# Altium PCB PCB1.PcbDoc
Units mil, origin at the board's own origin, x right, y up, seen from the top; angles counter-clockwise.
Board outline 3290 x 3910 mil, 2 copper layers (Top Layer, Bottom Layer); 49 components, 38 nets, 154 pads, 3 vias.
Unrouted connection lines stored in the file: 1.
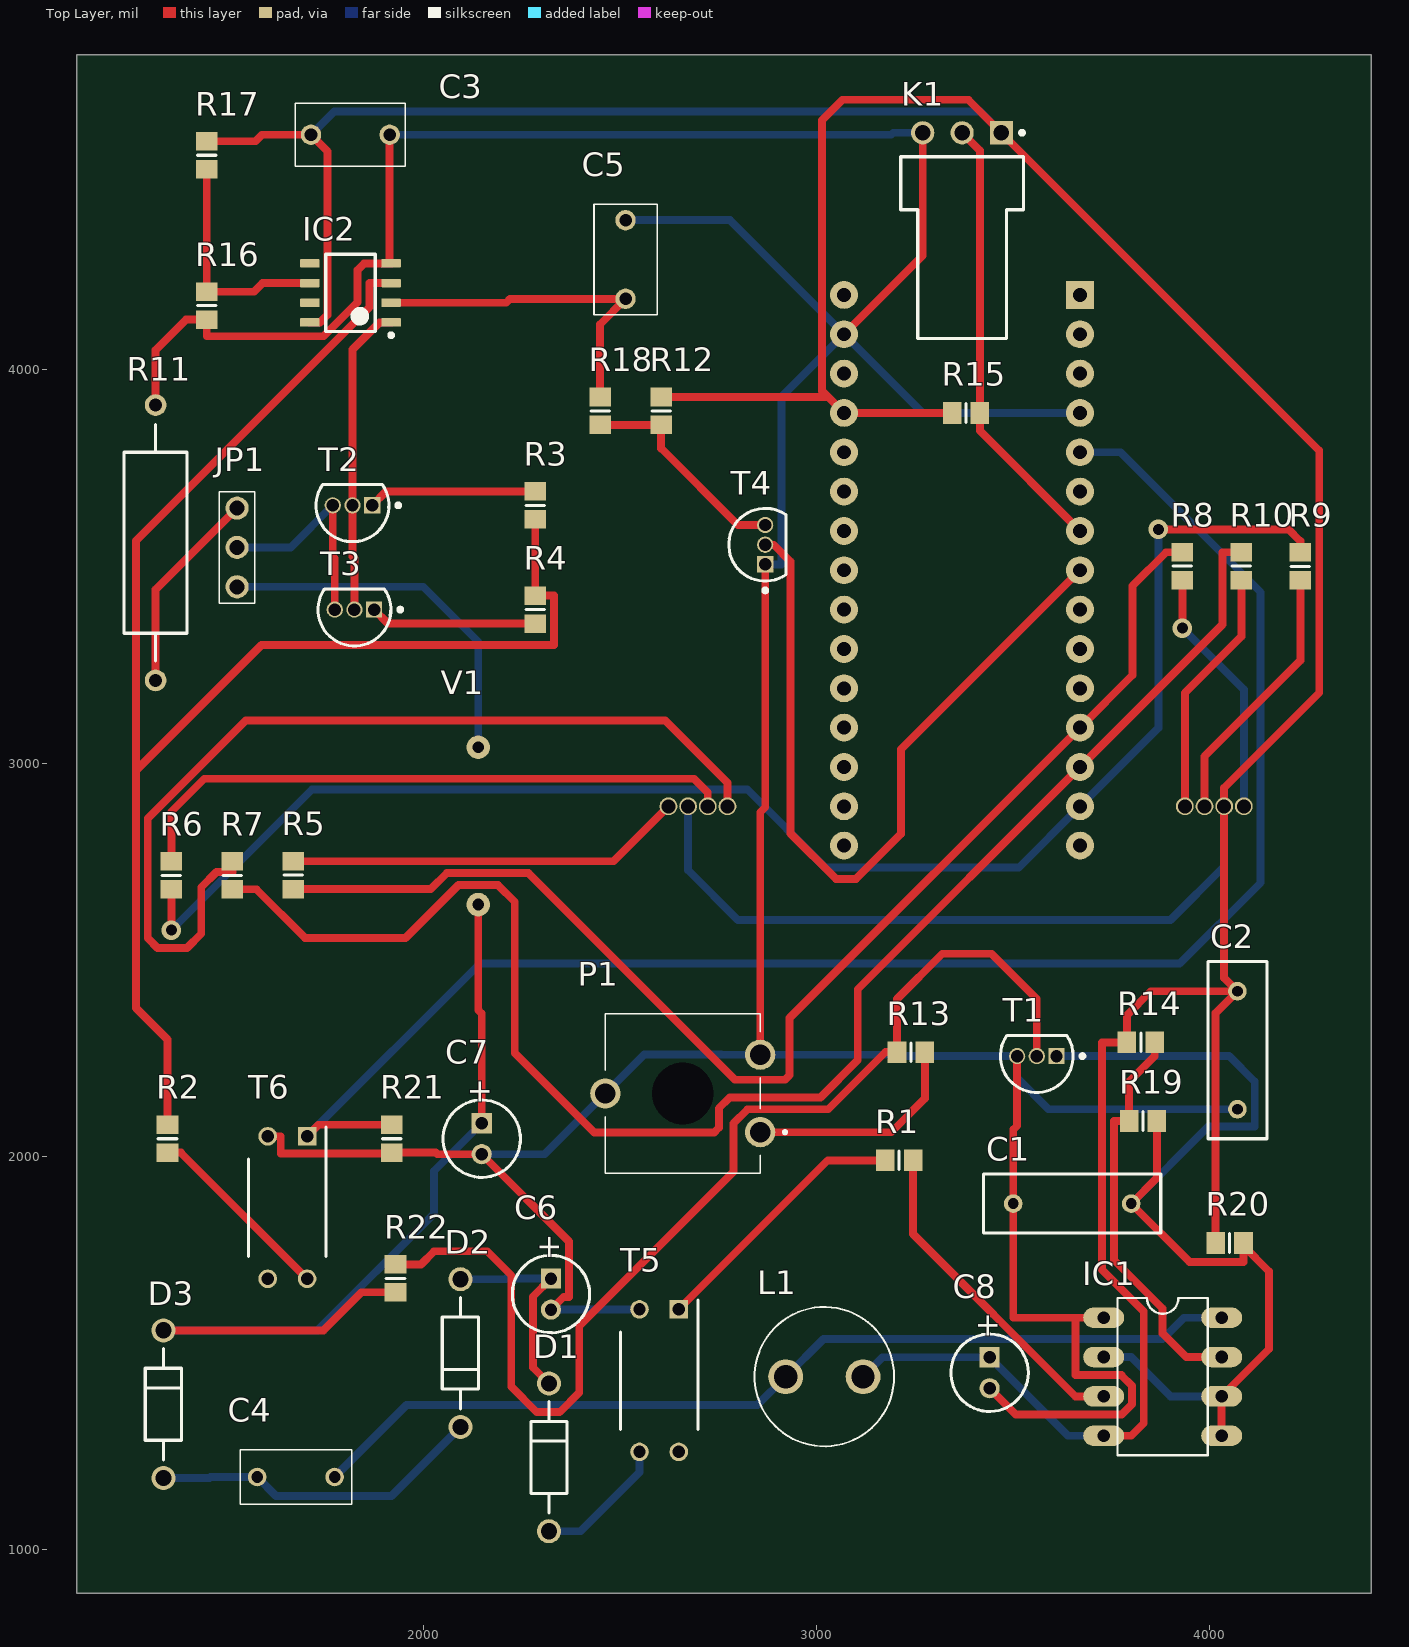
[diagram p0: Top Layer view]
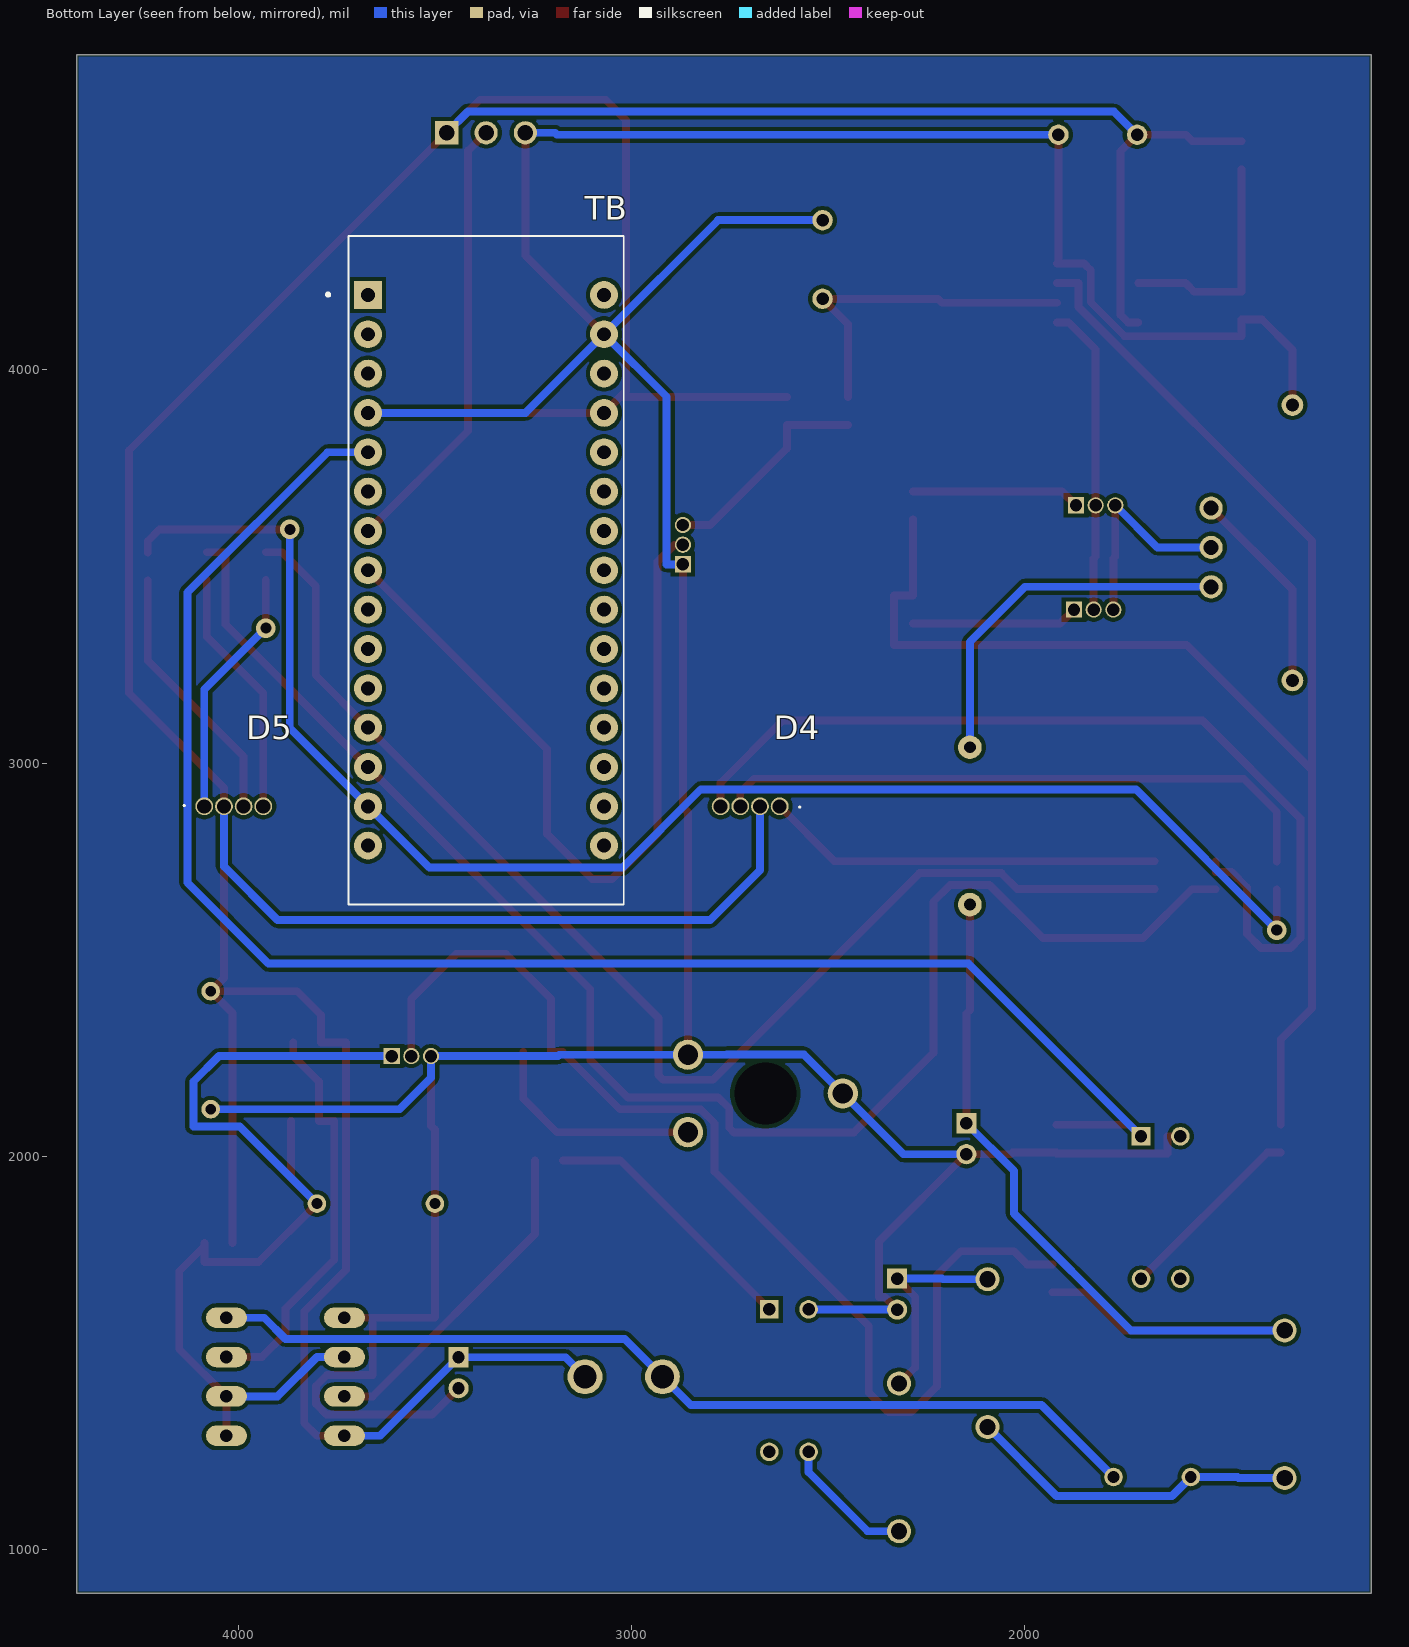
[diagram p1: Bottom Layer view, seen from below]

## Layer stack, top to bottom
Top Solder: solder mask 0.4, Solder Resist, Dk 3.5
Top Layer: signal copper 1.4
Dielectric 1: dielectric 12.6, FR-4, Dk 4.8
Bottom Layer: signal copper 1.4
Bottom Solder: solder mask 0.4, Solder Resist, Dk 3.5

## Board outline
1120,890 4410,890 4410,4800 1120,4800

## Design rules (kind name [scope] priority, off if disabled: settings)
Clearance [All] p1: gap=10 ignorepadtopadclearanceinfootprint=FALSE except(0: Arc-Hole Track-Hole SMDPad-Hole THPad-Hole Via-Hole Fill-Hole Poly-Hole Region-Hole Text-Hole)
PolygonConnect [All] p1: connectstyle=Relief reliefconductorwidth=10 reliefentries=4 polygonreliefangle="90 Angle" airgapwidth=10
RoutingVias [All] p1: holewidth=28 width=50 viastyle="Through Hole" minholewidth=28 minwidth=50 maxholewidth=28 maxwidth=50
SolderMaskExpansion [All] p1: expansion=4 istentingtop=FALSE
Width [All] p1: maxlimit=25 minlimit=20 preferedwidth=20
30 further rules are at their usual default settings.

## Components (designator, comment, footprint, x,y, rotation, side; value= is the part's Value field where it differs from the comment)
C1 "Cap" RAD-0.3 3650,1880 r0 top value=330pF
C2 "Cap" RAD-0.3 4070,2270 r90 top value=330pF
C3 "100n" C330C105K5R5TA7303 1715,4597 r0 top
C4 "100nF 100V" BFC247086104 1775,1185 r180 top
C5 "1µ" C330C105K5R5TA7303 2514.57,4180 r90 top
C6 "2µ2 200V" CAPPR55-200-1100X500X1200 2325,1650 r270 top
C7 "2µ2 200V" CAPPR55-200-1100X500X1200 2149,2045 r270 top
C8 "220µ" CAPPR55-200-1100X500X1200 3440,1450 r270 top
D1 "MUR160G" ONSC-AXIAL_LEAD-2-59-10_P 2320,1235 r270 top
D2 "MUR160G" ONSC-AXIAL_LEAD-2-59-10_P 2095,1500 r90 top
D3 "MUR160G" ONSC-AXIAL_LEAD-2-59-10_P 1340,1370 r270 top
D4 "521-8559F" 5218559F 2623.66,2890 r270 bottom
D5 "521-8559F" 5218559F 4086.34,2890 r90 bottom
IC1 "ICM7555" DIL08 3880,1440 r270 top
IC2 "LM6142NOPB" D0008A_L 1815.43,4195 r180 top
JP1 "87224-3" 872243 1527,3448 r90 top
K1 "61900319521" 61900319521 3370,4310 r0 top
L1 "1.2A" LHL08TB100K 3020,1440 r180 top value=47mH
P1 "4k7" PT10LV10205A2020S 2856.85,2061.57 r90 top
R1 "47e" 6-0805_N 3210,1990 r180 top
R2 "1k 1%" 6-0805_N 1350,2045 r270 top
R3 "330e" 6-0805_N 2285,3655 r270 top
R4 "330e" 6-0805_N 2285,3390 r90 top
R5 "330e" 6-0805_N 1670,2715 r270 top
R6 "330e" 6-0805_N 1360,2714.57 r270 top
R7 "330e" 6-0805_N 1515,2714.57 r270 top
R8 "330e" 6-0805_N 3930,3500.43 r90 top
R9 "330e" 6-0805_N 4230,3500 r90 top
R10 "330e" 6-0805_N 4080,3500.43 r90 top
R11 "820e 1W" AXIAL-0.7 1320,3560 r270 top
R12 "1k 1%" 6-0805_N 2605,3895 r270 top
R13 "2k2 1%" 6-0805_N 3240,2265 r0 top
R14 "3k3" 6-0805_N 3824.57,2290 r0 top
R15 "4k7" 6-0805_N 3380,3890 r0 top
R16 "10k" 6-0805_N 1450,4162.57 r90 top
R17 "10k" 6-0805_N 1450,4545 r90 top
R18 "10k 1%" 6-0805_N 2450,3895 r90 top
R19 "27k" 6-0805_N 3830,2090 r0 top
R20 "27k" 6-0805_N 4050,1780 r0 top
R21 "100k" 6-0805_N 1920,2045 r90 top
R22 "820k 1%" 6-0805_N 1930,1690 r90 top
T1 "BC547B" ONSC-TO-92-3-29-11 3560,2255 r180 top
T2 "MPSA42" ONSC-TO-92-3-29-11 1820.43,3655 r180 top
T3 "MPSA42" ONSC-TO-92-3-29-11 1825.43,3390 r180 top
T4 "2N7000" ONSC-TO-92-3-29-11 2869.57,3555 r90 top
T5 "IRLD110" DIP920W60P254L490H337Q4N 2600,1430 r270 top
T6 "IRLD110" DIP920W60P254L490H337Q4N 1655,1870 r270 top
TB "ARDUINO_NANO" SHIELD_ARDUINO_NANO 3370,3490 r180 bottom
V1 "IN-9" PCBComponent_1 2140,2640 r90 top

## Footprints (in the part's own frame and the unit in brackets; to place one, negate y for a bottom-side part, rotate by r counter-clockwise, add the part's x,y. Pads: shape width x height; smd on the part's side, far side on the other; paste and mask are expansions set on the pad)
6-0805_N [mm] "Chip Resistor, Body 2.0x1.2mm, IPC Medium Density"
  rect 1.2x1.4 smd: 1(-0.9,0) 2(0.9,0)
  silkscreen extent 0,-0.6 0,0.6, body extent -1.07,-0.7 1.07,0.7, height 0.7
872243 [mil]
  round 59.09 hole 38: 1(0,0) 2(100,0) 3(200,0)
  silkscreen extent -42,-45 242,45, body extent -42,-46 242,46, height 409
5218559F [mm]
  round 1.15 hole 0.91: 1(0,0) 2(0,-1.27) 3(0,-2.54) 4(0,-3.81)
  silkscreen extent 0,1.25 0.1,1.34, body extent -2.54,-4.45 2.54,0.63, height 8.7
61900319521 [mm] "2.54mm Male Right Angled Locking Header Top Locking, 3p"
  rect 1.5x1.5 hole 1: 1(2.54,7.42)
  round 1.5 hole 1: 2(0,7.42) 3(-2.54,7.42)
  silkscreen extent -3.96,-5.88 3.99,7.54, body extent -3.81,-5.75 3.81,7.77, height 5.83
AXIAL-0.7 [mm] "Axial Device, Thru-Hole; 2 Leads; 0.7 in Pin Spacing"
  round 1.4 hole 0.85: 1(-8.89,0) 2(8.89,0)
  silkscreen extent -7.62,-2.03 7.62,2.03
BFC247086104 [mm]
  round 1.2 hole 0.75: 1(0,0) 2(5,0)
  silkscreen extent -1.1,-1.75 6.1,1.75, body extent -1.1,-1.75 6.1,1.75, height 8.1
C330C105K5R5TA7303 [mm]
  round 1.316 hole 0.81: 1(0,0) 2(5.08,0)
  silkscreen extent -1.01,-2.03 6.09,2.03, body extent -1.01,-2.03 6.09,2.03, height 10.76
CAPPR55-200-1100X500X1200 [mm] "THD, 2-Leads, Dia 5mm, Body Length 11mm"
  rect 1.3x1.3 hole 0.8: 1(-1,0)
  round 1.3 hole 0.8: 2(1,0)
  silkscreen extent -2.5,-2.5 2.5,2.5, body extent -2.5,-2.5 2.5,2.5, height 12
D0008A_L [mm] "SOIC, 8-Leads, Body 5x4mm, Pitch 1.27mm, IPC High Density"
  rrect18% 1.25x0.55 smd: 1(-2.625,1.905) 2(-2.625,0.635) 3(-2.625,-0.635) 4(-2.625,-1.905) 5(2.625,-1.905) 6(2.625,-0.635) 7(2.625,0.635) 8(2.625,1.905)
  silkscreen extent -2.75,-2.5 1.6,2.85, body extent -3,-2.45 3,2.45, height 1.63
DIL08 [mil]
  oval 52x104 hole 32: 1(-150,-150) 2(-50,-150) 3(50,-150) 4(150,-150) 5(150,150) 6(50,150) 7(-50,150) 8(-150,150)
  silkscreen extent -200,-115 200,115, body extent -189,-215 189,215, height 210
DIP920W60P254L490H337Q4N [mm]
  rect 1.2x1.2 hole 0.8: 1(-4.602,1.27)
  round 1.2 hole 0.8: 2(-4.602,-1.27) 3(4.602,-1.27) 4(4.602,1.27)
  silkscreen extent -5.2,-2.5 3.14,2.5, body extent -4.75,-2.45 4.75,2.45, height 3.37
LHL08TB100K [mm]
  round 2.25 hole 1.5: 1(-2.5,0) 2(2.5,0)
  silkscreen extent -4.5,-4.5 4.5,4.5
ONSC-AXIAL_LEAD-2-59-10_P [mm] "AXIAL, 2-Leads, Diameter 2.35mm"
  round 1.55 hole 1.05: 1(-4.77,0) 2(4.77,0)
  silkscreen extent -3.6,-1.18 3.6,1.18
ONSC-TO-92-3-29-11 [mm] "TO, 3-Leads, Body Dia 4.7mm, Pitch 1.27mm"
  rect 1.05x1.05 hole 0.8: 1(-1.27,0)
  round 1.05 hole 0.8: 2(0,0) 3(1.27,0)
  silkscreen extent -3.08,-1.34 2.35,2.35, body extent -2.35,-1.33 2.36,2.36, height 7.87
PCBComponent_1 [mil]
  round 60 hole 30: 1(0,0) 2(400,0)
PT10LV10205A2020S [mm]
  round 1.95 hole 1.3: A1(0,0) E1(5,0) S1(2.5,10)
  round 2 hole 4 unplated: MH1(2.5,5)
  silkscreen extent -2.65,-1.7 7.65,10, body extent -2.65,-0.55 7.65,10.55, height 6.3
RAD-0.3 [mm] "Radial Cap, Thru-Hole; 2 Leads; 0.3 in Pin Spacing"
  round 1.2 hole 0.7: 1(-3.81,0) 2(3.81,0)
  silkscreen extent -5.71,-1.91 5.71,1.91
SHIELD_ARDUINO_NANO [mm]
  rect 1.8x1.8 hole 0.9: 1(-7.62,17.78)
  round 1.8 hole 0.9: 2(-7.62,15.24) 3(-7.62,12.7) 4(-7.62,10.16) 5(-7.62,7.62) 6(-7.62,5.08) 7(-7.62,2.54) 8(-7.62,0) 9(-7.62,-2.54) 10(-7.62,-5.08) 11(-7.62,-7.62) 12(-7.62,-10.16) 13(-7.62,-12.7) 14(-7.62,-15.24) 15(-7.62,-17.78) 16(7.62,-17.78) 17(7.62,-15.24) 18(7.62,-12.7) 19(7.62,-10.16) 20(7.62,-7.62) 21(7.62,-5.08) 22(7.62,-2.54) 23(7.62,0) 24(7.62,2.54) 25(7.62,5.08) 26(7.62,7.62) 27(7.62,10.16) 28(7.62,12.7) 29(7.62,15.24) 30(7.62,17.78)
  silkscreen extent -10.3,-21.59 8.89,21.59

## Part data
C1 C2: "Capacitor", LatestRevisionDate=17-Jul-2002, LatestRevisionNote="Re-released for DXP Platform.", PackageDescription="Radial Cap, Thru-Hole; 2 Leads; 0.3 in Pin Spacing", PackageReference=RAD-0.3, Published=8-Jun-2000, Publisher="Altium Limited"
C3 C5: library part C330C105K5R5TA7303, "Capacitor", Manufacturer_Name=Kemet, Mouser Part Number=80-C330C105K5R-TR, Arrow Part Number=C330C105K5R5TA7303, Arrow Price/Stock=https://www.arrow.com/en/products/c330c105k5r5ta7303/kemet-corporation, Datasheet Link=https://content.kemet.com/datasheets/KEM_C1050_GOLDMAX_X7R.pdf, Height=10.66mm, Manufacturer_Part_Number=C330C105K5R5TA7303, Mouser Price/Stock=https://www.mouser.com/Search/Refine.aspx?Keyword=80-C330C105K5R-TR
C4: library part BFC247086104, "Capacitor", Manufacturer_Name=Vishay, Mouser Part Number=594-2222-470-86104, Arrow Part Number=BFC247086104, Arrow Price/Stock=https://www.arrow.com/en/products/bfc247086104/vishay, Datasheet Link=https://www.vishay.com/docs/28112/mkt470.pdf, Height=8mm, Manufacturer_Part_Number=BFC247086104, Mouser Price/Stock=https://www.mouser.co.uk/ProductDetail/Vishay-BC-Components/BFC247086104?qs=m9M%252B25nfdj%2FpVccp3IS4nw%3D%3D
C6 C7 C8: library part CMP-1665-00038-2, "Aluminum Electrolytic Capacitor, 10 uF, +/- 20%, 50 V, -40 to 85 degC, 2-Pin THD, RoHS, Bulk", Capacitance=10uF, Case/Package=Radial, Dielectric Material=Aluminium, Leakage Current=3uA, Manufacturer=Panasonic, Max Operating Temperature=85degC, Min Operating Temperature=-40degC, Package Description="2-Pin Radial Lead, Dia 5 mm, Height 12 mm", Package Quantity=200, Package Reference=CAPPR55-200-1100X500X1200, Ripple Current=65mA, Tolerance=20%, Voltage=50V, Datasheet URL=https://industrial.panasonic.com/cdbs/www-data/pdf/RDF0000/ABA0000C1218.pdf, Datasheet Version="Rev. 05, 10/2016", Diameter=5mm, Dissipation Factor=0.12%, Height=11mm, Height - Seated (Max)=0.472inch, Lead Diameter=0.5mm, Lead Free=LeadFree, Lead Pitch=2mm, Lead/Base Style=Straight, Length=11mm, Life (Hours)=2000Hour, Manufacturer URL=http://www.panasonic.com/, Mount=ThroughHole, Number of Pins=2, Packaging=Bulk, Radiation Hardening=No, REACH SVHC=NoSVHC, Ripple Current (AC)=65mA, RoHSCompliant=true, Termination=Radial, Voltage Rating=50V, Voltage Rating (DC)=50V
D1 D2 D3: library part CMP-0902-00129-1, "SWITCHMODE(TM) Power Rectifier, 2-Pin Axial_Lead, Pb-Free, Bulk Bag", Manufacturer="On Semiconductor", ComponentLink1Description="Manufacturer URL", ComponentLink1URL=http://www.onsemi.com/, ComponentLink2Description=Datasheet, ComponentLink2URL=http://www.onsemi.com/pub_link/Collateral/MUR120-D.PDF, ComponentLink3Description="Package Specification", ComponentLink3URL=http://www.onsemi.cn/pub_link/Collateral/59-10.PDF, DatasheetVersion="Rev. 12", IFSM Max (A)=35, Mounting Technology="Through Hole", PackageDescription="2-Pin, Axial Lead, Diameter 2.35 mm", PackageReference=AXIAL_LEAD-2-59-10, PackageVersion="Rev. U, 02/2005", Packing="Bulk Bag", PartNumber=MUR160G, RoHS=TRUE, Type=Ultrafast, VRRM Max (V)=600
D4 D5: "LED", Manufacturer_Name=Dialight, Mouser Part Number=645-5218559F, Datasheet Link=http://www.dialightsignalsandcomponents.com/Assets/Drawings/2D_Drawings_DrawingDetailedSpec/NewDrawings/C18455B.pdf, Height=8.6mm, Manufacturer_Part_Number=521-8559F, Mouser Price/Stock=https://www.mouser.co.uk/ProductDetail/Dialight/521-8559F/?qs=vmHwEFxEFR%2FyCJVY9sdZTA%3D%3D
IC1: "555 Tipo, Temporizador / Oscilador (Ãšnico) IC 1MHz 8-SOIC", Package="SOIC-8 Renesas Electronics", Availability=Unavailable, Check_prices=https://www.snapeda.com/parts/ICM7555/Renesas%20Electronics%20America%20Inc./view-part/571575/?ref=eda, MF="Renesas Electronics", MP=ICM7555, Price=None, SnapEDA_Link=https://www.snapeda.com/parts/ICM7555/Renesas%20Electronics%20America%20Inc./view-part/571575/?ref=snap
IC2: library part CMP-0055-00755-3, "Dual High Speed/Low Power 17 MHz Rail-to-Rail I/O Operational Amplifier, 8-pin Narrow SOIC, Pb-Free", Manufacturer="Texas Instruments", Manufacturer Part Number=LM6142BIM/NOPB, Package Reference=D0008A, PackageTopMarking=NSZXTT*LM614*2BIM, PowerWise=N, Code_IPC=SOIC127P600-8, Code_JEDEC=MS-012-AA, ComponentLink1Description="Datasheet URL", ComponentLink1URL=http://www.ti.com/general/docs/lit/getliterature.tsp?genericPartNumber=LM6142&fileType=pdf, CompType=Amplifiers, PackageDescription="SOIC Narrow, 4.9 x 3.9 x 1.45mm, 8 Lead, 1.27mm Pitch", PinCount=8, RoHS=Y
JP1: "Connector", Manufacturer_Name="TE Connectivity", Mouser Part Number=571-872243, Arrow Part Number=87224-3, Arrow Price/Stock=https://www.arrow.com/en/products/87224-3/te-connectivity, Datasheet Link=https://www.mouser.com/datasheet/2/418/NG_CD_87224_L3-1263161.pdf, Height=10.3632mm, Manufacturer_Part_Number=87224-3, Mouser Price/Stock=https://www.mouser.co.uk/ProductDetail/TE-Connectivity/87224-3?qs=VKrXD49J9ErediZOfWku7Q%3D%3D
K1: library part CMP-1502-00600-1, "Male Top Locking Header WR-WTB, THT, Right Angled, pitch 2.54 mm, 1 x 3 position", Contact Resistance=20mOhm, Manufacturer="Wurth Elektronik", Operating Temperature=-40to105degC, Working Voltage=250VAC, Datasheet URL=https://katalog.we-online.de/em/datasheet/6190xx19521.pdf, Gender=Male, Manufacturer URL=http://www.we-online.de, Mounting Technology=THT, Orientation=RightAngled, Package Reference=61900319521, Packaging=Bag, Part Number=61900319521, Pitch=2.54mm, Position=1x3, Publisher=WurthElektronik
L1: library part Inductor, "Inductor", Code_IEC=1005, Code_JEITA=0402, LatestRevisionDate=29-May-2009, LatestRevisionNote="IPC-7351 Footprint Added.", PackageDescription="Chip Inductor", PackageReference=0402-A, Published=8-Jun-2000, Publisher="Altium Limited"
P1: library part PT10LV10-205A2020-S, "Variable Resistor", Manufacturer_Name=PIHER, Datasheet Link=https://www.mouser.in/datasheet/2/18/1/12_PT10v03-1499201.pdf, Height=6.2mm, Manufacturer_Part_Number=PT10LV10-205A2020-S
R1 R2 R3 R4 R5 R6 R7 R8 R9 R10 R12 R13 R14 R15 R16 R17 R18 R19 R20 R21 R22: library part "Res Thermal", "resistor", Code_IPC=RESC2012, LatestRevisionDate=29-May-2009, LatestRevisionNote="IPC-7351 Footprint Added.", PackageDescription="Chip Resistor 0805 Case Size", PackageReference=6-0805, PackageVersion=Mar-2003, Published=24-Mar-1999, Publisher="Altium Limited"
R11: library part CMP-1018-00072-2, "RES Thick Film, 820Ω, 5%, 1W, 200ppm/°C, 2512", Case Code (Imperial)=2512, Case Code (Metric)=6432, Manufacturer="Vishay Dale", Manufacturer Part Number=CRCW2512820RJNEG, Max Operating Temperature=155°C, Max Power Dissipation=1W, Min Operating Temperature=-55°C, Package Quantity=1, Resistance=820R, Temperature Coefficient=200ppm/°C, Tolerance=5%, Voltage Rating=500V, Case/Package=2512, Composition="Thick Film", Contact Plating=Tin, Depth=3.15mm, Features="Automotive AEC-Q200", Height=0.028inch, Lead Free="Lead Free", Length=6.3mm, Military Standard=Not, Number of Terminations=2, Packaging="Tape and Reel", Power Rating=1W, Radiation Hardening=No, Voltage Rating (DC)=500V, Weight=0.001429oz, Width=0.124inch
T1: library part CMP-1048-01467-1, "Amplifier Transistor, NPN Silicon, 3-Pin TO-92, Bulk Box", Manufacturer="On Semiconductor", ComponentLink1Description="Manufacturer URL", ComponentLink1URL=http://www.onsemi.com/, ComponentLink2Description=Datasheet, ComponentLink2URL=http://www.onsemi.com/pub_link/Collateral/BC546-D.PDF, ComponentLink3Description="Package Specification", ComponentLink3URL=http://www.onsemi.cn/pub_link/Collateral/2N6426-D.PDF, DatasheetVersion="Rev. 7", fT Min (MHz)=150, IC Continuous (A)=0.1, Mounting Technology="Through Hole", PackageDescription="3-Pin Transistor Outline, Body 4.825 x 3.685 mm, Pitch 1.27 mm", PackageReference=TO-92-3-29-11_AM_SL, PackageVersion="Rev. AM", Packing="Bulk Box", PartNumber=BC547B, Polarity=NPN, RoHS=FALSE
T2 T3: library part CMP-1048-01390-1, "High Voltage Transistor, NPN Silicon, 3-Pin TO-92, Bulk Box", Manufacturer="On Semiconductor", ComponentLink1Description="Manufacturer URL", ComponentLink1URL=http://www.onsemi.com/, ComponentLink2Description=Datasheet, ComponentLink2URL=http://www.onsemi.cn/pub_link/Collateral/MPSA42-D.PDF, ComponentLink3Description="Package Specification", ComponentLink3URL=http://www.onsemi.cn/pub_link/Collateral/2N6426-D.PDF, DatasheetVersion="Rev. 8", fT Min (MHz)=50, IC Continuous (A)=0.5, Mounting Technology="Through Hole", Note1=0, PackageDescription="3-Pin Transistor Outline, Body 4.825 x 3.685 mm, Pitch 1.27 mm", PackageReference=TO-92-3-29-11_AM_SL, PackageVersion="Rev. AM", Packing="Bulk Box", PartNumber=MPSA42, Polarity=NPN, RoHS=FALSE
T4: library part CMP-1058-00936-1, "Small Signal MOSFET, 200 mA, 60 V, N-Channel, 3-Pin TO-92, Bulk Box", Manufacturer="On Semiconductor", Package Type=TO-92, Channel Polarity="N Channel", Ciss Typ (pF)=60, ComponentLink1Description="Manufacturer URL", ComponentLink1URL=http://www.onsemi.com/, ComponentLink2Description=Datasheet, ComponentLink2URL=http://www.onsemi.com/pub_link/Collateral/2N7000-D.PDF, ComponentLink3Description="Package Specification", ComponentLink3URL=http://www.onsemi.cn/pub_link/Collateral/2N6426-D.PDF, Configuration=Single, Coss Typ (pF)=25, Crss Typ (pF)=5, DatasheetVersion="Rev. 8", ID Max (A)=0.2, Mounting Technology="Through Hole", PackageDescription="3-Pin Transistor Outline, Body 4.825 x 3.685 mm, Pitch 1.27 mm", PackageReference=TO-92-3-29-11_AM_SL, PackageVersion="Rev. AM", Packing="Bulk Box", PartNumber=2N7000, PD Max (W)=0.35, V(BR)DSS Min (V)=60, VGS Max (V)=20, VGS(th) Max (V)=3
T5 T6: library part IRLD110PBF, "MOSFET (N-Channel)", Manufacturer_Name=Vishay, Mouser Part Number=844-IRLD110PBF, Arrow Part Number=IRLD110PBF, Arrow Price/Stock=https://www.arrow.com/en/products/irld110pbf/vishay, Datasheet Link=http://uk.rs-online.com/web/p/products/0301338P, Height=3.37mm, Manufacturer_Part_Number=IRLD110PBF, Mouser Price/Stock=https://www.mouser.co.uk/ProductDetail/Vishay-Siliconix/IRLD110PBF?qs=cvaI6ThkwxutctgzXpBGHg%3D%3D
TB: "ATSAMD21G18A Arduino Nano 33 IoT SAM D ARMÂ® CortexÂ®-M0+ MCU 32-Bit Embedded Evaluation Board", Package=None, Availability=Unavailable, MF=Arduino, MP="ARDUINO NANO", Price=None, SnapEDA_Link=https://www.snapeda.com/parts/ARDUINO%20NANO/Arduino/view-part/1128261/?ref=snap
V1: library part Component_1

## Via types
v1: diameter 50, hole 28, Top Layer to Bottom Layer, 3 vias

## Nets (pads, with @x,y where several pads share a name; then routed paths per layer and width w, separated by ;. In a path a pad name is that pad's centre, name@x,y a point inside that pad or via, vN(x,y) a via of type N, cw(c..) or ccw(c..) an arc to the next point about the centre after c; other vN are vias at no path point)
+3.3V: TB.17
+5: C2.2 C3.1 C8.1 D4.2 D5.2 IC1.4 IC2.8 K1.1 L1.1 R12.1 R14.1 R15.1 R17.2 R20.1 TB.27 | length 11941
  Top Layer w20: R17.2 1574,4580.43 1590.57,4597 C3.1 1757,4555 1757,4139.18 1737.82,4120 IC2.8 ; R12.1 3029.57,3930.43 ; R15.1 TB.27 3029.57,3930.43 ; IC1.4 3800,1290 3832,1322 3832,1606 3726,1712 3726,2290 R14.1 3789.13,2359.13 3850,2420 C2.2 ; R20.1 4014.57,2364.57 C2.2 ; 3029.57,3930.43 3014,3946 3014,4634 3066,4686 3386.13,4686 K1.1 4278,3794.13 4278,3178.66 4036.34,2937 D5.2 4036.34,2453.66 C2.2
  Bottom Layer w20: C3.1 1774,4656 3416.13,4656 K1.1 ; D4.2 2673.66,2727.34 2800,2601 3900,2601 4036.34,2737.34 D5.2 ; L1.1 3167.8,1489.37 C8.1 3639.37,1290 IC1.4
+150: C7.1 D3.1 R22.1 V1.1 | length 2280
  Top Layer w20: D3.1 1746.8,1557.8 1843.57,1654.57 R22.1 ; V1.1 2140,2372 2149,2363 C7.1
  Bottom Layer w20: D3.1 1730.8,1557.8 2028,1855 2028,1963.37 C7.1
GND: C1.1 C2.1 C3.2 C5.2 C6.2 C7.2 C8.2 IC1.1 IC2.4 K1.3 P1.E1 P1.S1 R11.1 R16.1 R21.1 T1.3 T4.1 T5.2 T6.2 TB.4 TB.29 | length 11613.4
  Top Layer w20: R11.1 1320,4050 1397.13,4127.13 R16.1 1450,4085 1746.72,4085 1832.94,4171.22 1832.94,4252.87 1850.07,4270 IC2.4@1915,4270 ; T6.2 1638,2051.18 1638,2007 1920,2007 R21.1 2032,2009.57 2035.94,2005.63 C7.2 2371,1783.63 2371,1643 2357.37,1643 C6.2 ; C3.2 IC2.4@1915,4270 ; IC2.4 IC2.4@1915,4270 ; P1.E1 2856.85,2875 2869.57,2887.72 T4.1 ; TB.29 3270,4290 K1.3 ; C8.2 3506.63,1344 3776,1344 3802,1370 3802,1417 3775,1444 3658,1444 3658,1590 ; T1.3 3510,2078 3500,2068 C1.1 3500,1591 3501,1590 3658,1590 ; IC1.1 3658,1590
  Bottom Layer w20: C3.2 3190,4597 3195.13,4602.13 K1.3 ; C7.2 2308.78,2005.63 P1.S1 2562.15,2259 2758,2259 2758.57,2258.43 P1.E1 3184,2258.43 3187.43,2255 T1.3 3510,2200 3590,2120 C2.1 ; C6.2 2437,1610.63 2437.55,1611.18 T5.2 ; C5.2 2780,4380 TB.29 ; T4.1 2911,3505 2911,3931 TB.29 ; TB.4 3270,3890 TB.29
NetC1_2: C1.2 IC1.2 IC1.5 IC1.6 R19.2 R20.2 T1.1 | length 2572.4
  Top Layer w20: R19.2 3865.43,1945.43 C1.2 3948,1732 4085.43,1732 R20.2@4085.43,1772.57 ; IC1.5 IC1.6 4150,1510 4150,1708 R20.2@4085.43,1772.57 ; R20.2 R20.2@4085.43,1772.57
  Bottom Layer w20: T1.1 4049,2255 4114,2190 4114,2076 3996,2076 C1.2 ; IC1.2 3800,1490 3900,1390 IC1.6
NetC4_1: C4.1 IC1.8 L1.2 | length 2422.8
  Bottom Layer w20: C4.1 1958,1368 2849.57,1368 L1.2 3017.57,1536 3880,1536 3934,1590 IC1.8
NetC4_2: C4.2 D2.1 D3.2 | length 848.6
  Bottom Layer w20: D3.2 1457,1182.2 1459.8,1185 C4.2 1626.15,1137 1919.8,1137 D2.1
NetC5_1: C5.1 IC2.2 R18.2 | length 876.2
  Top Layer w20: IC2.2 2211,4170 2221,4180 C5.1 2450,4115.43 R18.2
NetC6_1: C6.1 D1.1 D2.2 | length 533.3
  Top Layer w20: D1.1 2279,1463.8 2279,1643.37 C6.1
  Bottom Layer w20: D2.2 2209,1687.8 2210.57,1689.37 C6.1
NetD1_2: D1.2 T5.3 | length 343.7
  Bottom Layer w20: D1.2 2400,1047.2 2550,1197.2 T5.3
NetD4_1: D4.1 R5.1 | length 1011.5
  Top Layer w20: R5.1 2484.1,2750.43 D4.1
NetD4_3: D4.3 R6.1 | length 1574
  Top Layer w20: R6.1 1360,2876 1444,2960 2688.66,2960 2723.66,2925 D4.3
NetD4_4: D4.4 R7.1 | length 2407.7
  Top Layer w20: R7.1 1515,2723 1475,2723 1436,2684 1436,2566 1400,2530 1325,2530 1300,2555 1300,2859 1549,3108 2615.66,3108 2773.66,2950 D4.4
NetD5_1: D5.1 R8.1 | length 639.8
  Top Layer w20: v1(3930,3343) R8.1
  Bottom Layer w20: v1(3930,3343) 4086.34,3186.66 D5.1
NetD5_3: D5.3 R9.1 | length 675.5
  Top Layer w20: D5.3 3986.34,3017 4230,3260.66 R9.1
NetD5_4: D5.4 R10.1 | length 634.5
  Top Layer w20: D5.4 3936.34,3178 4080,3321.66 R10.1
NetIC1_3: IC1.3 R1.1 | length 842.9
  Top Layer w20: R1.1 3245.43,1802.57 3658,1390 IC1.3
NetIC1_7: IC1.7 R14.2 R19.1 | length 1031.9
  Top Layer w20: R14.2 3860,2255.43 3794.57,2190 R19.1 3756,2090 3756,1737 3880,1613 3880,1550 3940,1490 IC1.7
NetIC2_1: IC2.1 T2.2 T3.2 | length 790.3
  Top Layer w20: T3.2 1825.43,3520 1820.43,3525 T2.2 1820.43,4051.43 1889,4120 IC2.1
NetIC2_3: IC2.3 R2.1 R3.2 R4.2 | length 4036.2
  Top Layer w20: R2.1 1350,2297 1270,2377 1270,2981 ; IC2.3 1864,4220 1864,4159 1270,3565 1270,2981 ; R3.2 R4.2 2333,3425.43 2333,3300 1589,3300 1270,2981
NetIC2_5: IC2.5 IC2.7
NetIC2_6: IC2.6 R16.2 R17.1 | length 582.8
  Top Layer w20: R17.1 R16.2 1570,4198 1592,4220 IC2.6
NetJP1_1: JP1.1 V1.2 | length 939
  Bottom Layer w20: JP1.1 2000,3448 2140,3308 V1.2
NetJP1_2: JP1.2 T2.3 T3.3 | length 554.8
  Top Layer w20: T2.3 1770.43,3525 1775.43,3520 T3.3
  Bottom Layer w20: JP1.2 1663.43,3548 T2.3
NetJP1_3: JP1.3 R11.2 | length 523.7
  Top Layer w20: R11.2 1320,3441 JP1.3
NetK1_2: K1.2 R15.2 TB.7 | length 1136.4
  Top Layer w20: K1.2 3415.43,4556.69 R15.2 3415.43,3844.57 TB.7
NetP1_A1: P1.A1 R13.2 | length 572
  Top Layer w20: P1.A1 3190,2061.57 3275.43,2147.01 R13.2
NetR1_2: R1.2 T5.1 | length 681.5
  Top Layer w20: T5.1 3028.82,1990 R1.2
NetR2_2: R2.2 T6.4 | length 487.9
  Top Layer w20: R2.2 1384.25,2009.57 T6.4
NetR3_1: R3.1 T2.1 | length 429.2
  Top Layer w20: T2.1 1905.87,3690.43 R3.1
NetR4_1: R4.1 T3.1 | length 424.2
  Top Layer w20: T3.1 1910.87,3354.57 R4.1
NetR5_2: R5.2 R8.2 TB.12 | length 3267.5
  Top Layer w20: R5.2 2019.57,2679.57 2060,2720 2268,2720 2793,2195 2920,2195 2931.58,2206.58 2931.58,2351.58 TB.12 3803,3223 3803,3450 3888.87,3535.87 R8.2
NetR6_2: R6.2 R9.2 TB.14 | length 3897.9
  Top Layer w20: v1(1360,2575) R6.2 ; v1(3869,3594) 4200,3594 4230,3564 R9.2
  Bottom Layer w20: v1(1360,2575) 1718,2933 2824,2933 3023,2734 3514,2734 TB.14 3869,3089 v1(3869,3594)
NetR7_2: R7.2 R10.2 TB.13 | length 4010.8
  Top Layer w20: R7.2 1576,2679.13 1700.13,2555 1955,2555 2090,2690 2190,2690 2233,2647 2233,2263 2435,2061 2740,2061 2751.7,2072.7 2751.7,2122.08 2779.58,2149.96 3009.96,2149.96 3105,2245 3105,2425 TB.13 4032,3352 4032,3535.87 R10.2
NetR12_2: R12.2 R18.1 T4.3 | length 559.9
  Top Layer w20: R18.1 2527,3859.57 R12.2 2605,3800 2800,3605 T4.3
NetR13_1: R13.1 R22.2 T1.2 | length 2904.4
  Top Layer w20: R22.2 1994.43,1725.43 2028,1759 2163,1759 2224,1698 2224,1415 2289,1350 2347,1350 2397,1400 2397,1569 2789,1961 2789,2083.96 2825,2119.96 3029.96,2119.96 3175,2265 R13.1 3204.57,2400 3319.57,2515 3445,2515 3560,2400 T1.2
NetR21_2: R21.2 T6.1 TB.5 | length 4262.5
  Top Layer w20: T6.1 1734.25,2080.43 R21.2
  Bottom Layer w20: T6.1 2143.82,2490 3923,2490 4129,2696 4129,3433.76 3772.76,3790 TB.5
NetT4_2: T4.2 TB.8 | length 2008.4
  Top Layer w20: T4.2 2891,3555 2934,3512 2934,2821 3050,2705 3100,2705 3215,2820 3215,3035 TB.8
pads on no net: P1.MH1 T5.4 T6.3 TB.1 TB.2 TB.3 TB.6 TB.9 TB.10 TB.11 TB.15 TB.16 TB.18 TB.19 TB.20 TB.21 TB.22 TB.23 TB.24 TB.25 TB.26 TB.28 TB.30

## Polygon pours and split planes (outlines as drawn)
no net on Bottom Layer "NONET_L02_P000" (solid, pour order 0): 1125,4795 4405,4795 4405,895 1125,895

## Silkscreen, mask and mechanical layers (free items; w line width, h text height)
board outline:
  the board outline again, w10

## Text inside footprints (layer, text, board x,y; h text height)
C6: Top Overlay "+" at 2295.98,1803.86 h59.06 r270
C7: Top Overlay "+" at 2119.98,2198.86 h59.06 r270
C8: Top Overlay "+" at 3410.98,1603.86 h59.06 r270